# Allegro board moving_head_at88.brd
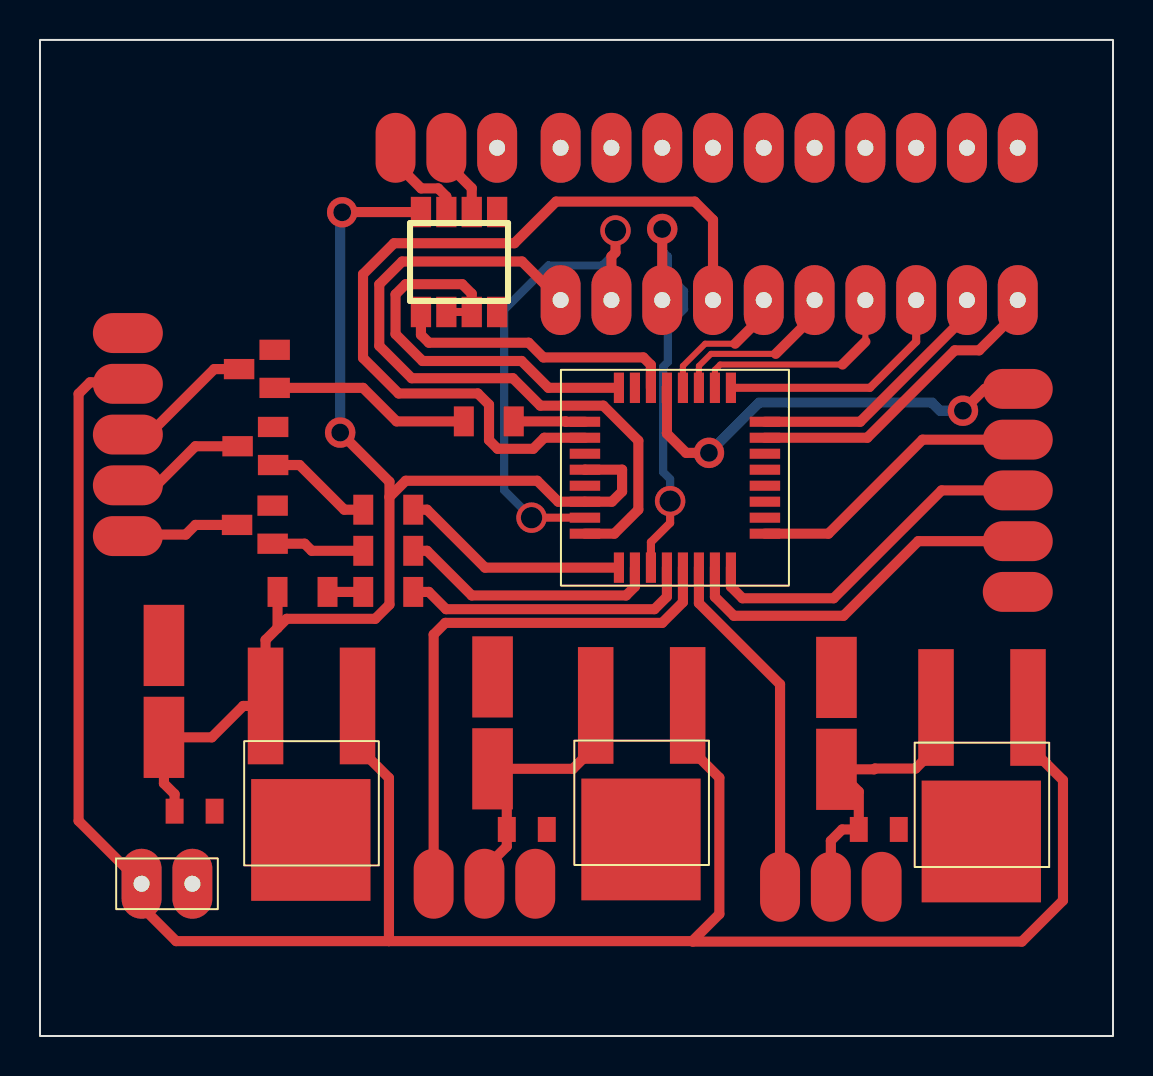
[diagram p0: board, top side]
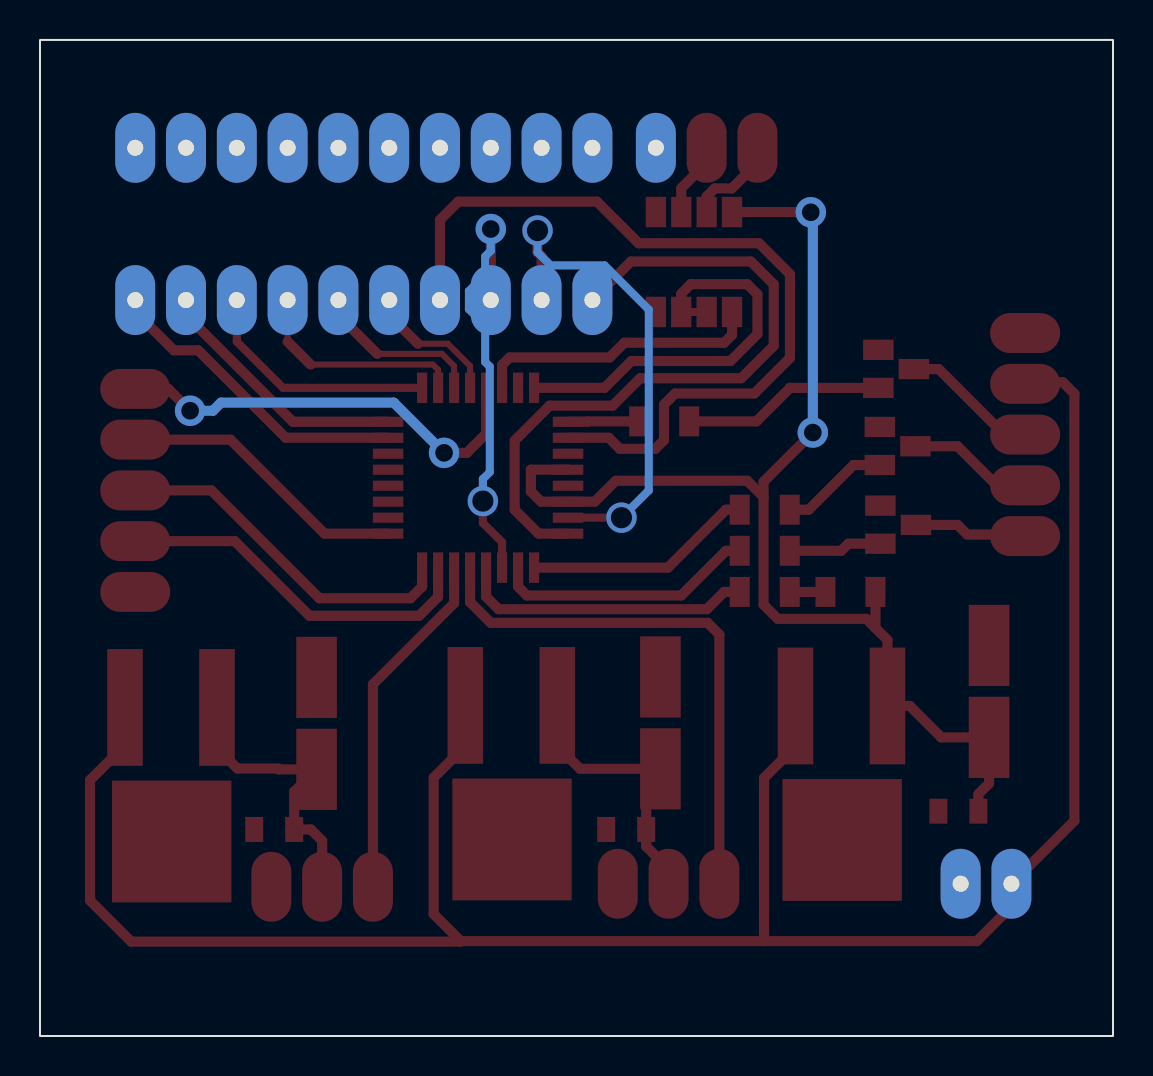
[diagram p1: board, bottom side, seen from below]

Outline 53.66 x 49.85 mm; copper layers: TOP, BOTTOM. Coordinates in mm from the lower left corner of the outline.
Outline path: rectangle 0,0 53.66,49.85

## Design rules (mm)
nets with their own width: min track width 0.127; nets ADR0 ADR1 ADR2 ADR3 ADR4 ADR5 ADR6 ADR7 ADR8 ADR9 INT0 MISO MOSI N07188 N07798 N07802 N08332 N08486 N08516 N12693 N12697 N13371 PWM_BLUE PWM_GREEN PWM_RED PWM_SERVO1 PWM_SERVO2 READ_LED RESET RXD SCK TXD VCC_12 VCC_SERVO1 VCC_SERVO2
nets with their own width: min track width 0.406; nets GND

## Placement (name value [footprint] x y rotation side)
C6  100uF  [FGCAP6377]  6.2 17.25 0 top
C7  100nF  [FG0805C]  6.73 11.25 0 top
C8  100uF  [FGCAP6377]  22.63 15.67 0 top
C9  100nF  [FG0805C]  23.34 10.34 0 top
C10  100uF  [FGCAP6377]  39.83 15.65 0 top
C11  100nF  [FG0805C]  40.94 10.34 0 top
J1  POWER  [JUMPER2]  5.08 7.62 0 top
J2  ADRESS  [FGDIP10]  48.89 36.83 270 bottom
J4  ISP  [FGCONN5]  48.89 32.39 180 top
J6  DMX  [FGCONN3#2]  22.86 44.45 90 top
J8  SERVO1  [FGCONN3]  19.69 7.62 270 top
J9  SERVO2  [FGCONN3]  37.01 7.47 270 top
J10  CON5  [FGCONN5]  4.39 25.02 0 top
LED2  GREEN  [FG0805R]  14.13 22.22 180 top
Q1  MOSFET N  [SOT23]  10.74 25.58 180 top
Q2  MOSFET N  [SOT23]  10.77 29.51 180 top
Q3  MOSFET N  [SOT23]  10.85 33.38 180 top
R3  390  [FG0805R]  18.41 22.22 180 top
R4  RESISTOR  [FG0805R]  18.41 24.28 180 top
R5  RESISTOR  [FG0805R]  18.41 26.34 180 top
R6  RESISTOR  [FG0805R]  23.44 30.76 180 top
U1  78HT2  [TO252AA]  15.88 16.48 180 top
U2  75176  [SO8]  20.95 38.73 90 top
U3  78HT2  [TO252AA]  32.38 16.51 180 top
U4  78HT2  [TO252AA]  49.4 16.41 180 top
U5  Atmega88  [TQFP32]  31.75 27.94 0 top

## Library data of the parts
C6 C8 C10 = CAP
C7 C9 C11 = CAP NP
J1 = CON2: User Part Number: ***
J2 = JUMPER10
J4 J10 = CON5
J6 J8 J9 = CON3
LED2 = LED
Q1-Q3 = MOSFET N_0
R3-R6 = RESISTOR
U1 U3 U4 = 78HT2
U2 = 75176_0
U5 = Atmega88_3

## Footprints (pads in the part's own frame, mm; a bottom-side part is the same pattern mirrored in y, then rotated)
FG0805C
  rect 0.9x1.25 smd: 1(0,0) 2(2,0)
FG0805R
  rect 1x1.5 smd: 1(-0.25,0) 2(2.25,0)
FGCAP6377
  rect 2.032x4.064 smd: 1(0,-2.3) 2(0,2.3)
FGCONN3
  oval 3.5x2 smd: 1(0,0) 2(0,2.54) 3(0,5.08)
FGCONN3#2
  oval 3.5x2 hole 0.8: 1(0,0)
  oval 3.5x2 smd: 2(0,2.54) 3(0,5.08)
FGCONN5
  oval 3.5x2 smd: 1(0,0) 2(0,2.54) 3(0,5.08) 4(0,7.62) 5(0,10.16)
FGDIP10
  oval 3.5x2 hole 0.8: 1(0,0) 2(-7.62,0) 3(0,2.54) 4(-7.62,2.54) 5(0,5.08) 6(-7.62,5.08) 7(0,7.62) 8(-7.62,7.62) 9(0,10.16) 10(-7.62,10.16) 11(0,12.7) 12(-7.62,12.7) 13(0,15.24) 14(-7.62,15.24) 15(0,17.78) 16(-7.62,17.78) 17(0,20.32) 18(-7.62,20.32) 19(0,22.86) 20(-7.62,22.86)
JUMPER2
  oval 2x3.5 hole 0.8: 1(0,0) 2(2.54,0)
SO8
  rect 1.524x1.016 smd: 1(-2.5,1.905) 2(-2.5,0.635) 3(-2.5,-0.635) 4(-2.5,-1.905) 5(2.5,-1.905) 6(2.5,-0.635) 7(2.5,0.635) 8(2.5,1.905)
SOT23
  rect 1.524x1.016 smd: 1(-0.889,0.94) 2(-0.889,-0.965) 3(0.889,0)
TO252AA
  rect 1.778x5.842 smd: 1(-0.004,-0.034) 3(4.596,-0.034)
  rect 5.969x6.096 smd: 2(2.332,6.673)
TQFP32
  rect 1.524x0.508 smd: 1(-4.5,2.8) 2(-4.5,2) 3(-4.5,1.2) 4(-4.5,0.4) 5(-4.5,-0.4) 6(-4.5,-1.2) 7(-4.5,-2) 8(-4.5,-2.8) 17(4.5,-2.8) 18(4.5,-2) 19(4.5,-1.2) 20(4.5,-0.4) 21(4.5,0.4) 22(4.5,1.2) 23(4.5,2) 24(4.5,2.8)
  rect 0.508x1.524 smd: 9(-2.8,-4.5) 10(-2,-4.5) 11(-1.2,-4.5) 12(-0.4,-4.5) 13(0.4,-4.5) 14(1.2,-4.5) 15(2,-4.5) 16(2.8,-4.5) 25(2.8,4.5) 26(2,4.5) 27(1.2,4.5) 28(0.4,4.5) 29(-0.4,4.5) 30(-1.2,4.5) 31(-2,4.5) 32(-2.8,4.5)

## Nets
GND: C6.2 C7.2 C8.2 C9.2 C10.2 C11.2 J1.2 J2.2 J2.4 J2.6 J2.8 J2.10 J2.12 J2.14 J2.16 J2.18 J2.20 J4.5 J6.1 J8.3 J9.3 J10.5 Q1.2(SOURCE) Q2.2(SOURCE) Q3.2(SOURCE) U1.2 U2.5 U3.2 U4.2 U5.3(GND0) U5.5(GND1) U5.21(GND2)
VCC_5V: C6.1 C7.1 LED2.2(ANODE) U1.3(VOUT) U2.8 U5.4(VCC0) U5.6(VCC1) U5.18(AVCC)
VCC_12: J1.1 J10.4 U1.1(VIN) U3.1(VIN) U4.1(VIN)
VCC_SERVO1: C8.1 C9.1 J8.2 U3.3(VOUT)
VCC_SERVO2: C10.1 C11.1 J9.2 U4.3(VOUT)
ADR0: J2.1 U5.23(PC0 (ADC0))
ADR1: J2.3 U5.24(PC1 (ADC1))
ADR2: J2.5 U5.25(PC2 (ADC2))
ADR3: J2.7 U5.26(PC3 (ADC3))
ADR4: J2.9 U5.27(PC4 (ADC4))
ADR5: J2.11 U5.28(PC5 (ADC5))
ADR6: J2.13 U5.2(PD4)
ADR7: J2.15 U5.11(PD7 (AIN1))
ADR8: J2.17 U5.7(PB6 (XTAL1))
ADR9: J2.19 U5.8(PB7 (XTAL2))
INT0: U2.2(RE) U2.3(DE) U5.32(PD2 (INT0))
MISO: J4.3 U5.16(PB4 (MISO))
MOSI: J4.4 U5.15(PB3 (MOSI))
PWM_BLUE: R6.1 U5.1(PD3 (OC2B))
PWM_GREEN: R5.1 U5.9(PD5 (OC0B))
PWM_RED: R4.1 U5.10(PD6 (OC0A))
PWM_SERVO1: J8.1 U5.13(PB1 (OC1A))
PWM_SERVO2: J9.1 U5.14(PB2 (OC1B))
READ_LED: R3.1 U5.12(PB0)
RESET: J4.1 U5.29(PC6 (RESET))
RXD: U2.1(R) U5.30(PD0 (RXD))
SCK: J4.2 U5.17(PB5 (SCK))
TXD: U2.4(D) U5.31(PD1 (TXD))
N07188: LED2.1(CATHODE) R3.2
N07798: J6.3 U2.7(B)
N07802: J6.2 U2.6(A)
N08332: Q3.1(GATE) R6.2
N08486: J10.1 Q1.3(DRAIN)
N08516: J10.3 Q3.3(DRAIN)
N12693: Q1.1(GATE) R4.2
N12697: Q2.1(GATE) R5.2
N13371: J10.2 Q2.3(DRAIN)

Pads without a net: U5 19 20 22

## Via types
v1: diameter 1.524, hole 0.889, TOP to BOTTOM, 5 vias
v2: diameter 1.524, hole 1.067, TOP to BOTTOM, 3 vias

## Routing (per net, layer and track width the routed paths; a pad name or vN(x,y) marks a point on that pad's centre or on a via; arc(x,y) is an arc through that point)
VCC_5V: length 61.9
  TOP w0.508: 11.88,20.42 12.34,20.88 16.76,20.88 17.48,21.59 17.48,26.97 ; 11.88,20.42 11.28,19.82 U1.3 10.16,16.52 8.59,14.95 C6.1 6.2,12.64 6.73,12.11 C7.1 ; 11.88,20.42 LED2.2 ; 17.48,26.97 17.48,27.74 v1(15.01,30.2) ; 17.48,26.97 18.29,27.79 24.87,27.79 25.91,26.74 U5.6 28.6,26.74 29.11,27.25 29.11,28.34 27.25,28.34 U5.4 ; v1(15.11,41.22) 15.74,41.22 15.75,41.24 U2.8
  BOTTOM w0.508: v1(15.11,41.22) 15.11,40.69 15.01,40.59 v1(15.01,30.2)
VCC_12: length 113.3
  TOP w0.508: 32.62,4.75 32.64,4.72 49.1,4.72 51.16,6.78 51.16,12.8 49.4,14.55 49.4,16.59 ; 32.62,4.75 33.97,6.1 33.97,12.93 32.39,14.51 U3.1 ; 32.62,4.75 17.45,4.75 ; 17.45,4.75 6.81,4.75 5.08,6.48 J1.1 1.93,10.77 1.93,32.14 2.5,32.72 4.44,32.72 ; 17.45,4.75 17.45,12.91 15.88,14.49 U1.1
VCC_SERVO1: length 14.2
  TOP w0.508: J8.2 22.22,8.37 23.34,9.49 C9.1 23.34,12.66 C8.1 26.65,13.37 27.79,14.51 U3.3
VCC_SERVO2: length 14.9
  TOP w0.508: U4.3 44.81,14.41 43.78,13.39 41.75,13.39 41.71,13.35 C10.1 40.94,12.23 C11.1 40.11,10.34 39.55,9.77 J9.2
ADR0: length 15.5
  TOP w0.508: 48.82,36.53 48.82,36.17 46.96,34.32 45.75,34.32 41.37,29.94 U5.23
ADR1: length 13.1
  TOP w0.508: U5.24 41.02,30.74 46.35,36.08 J2.3
ADR2: length 12.3
  TOP w0.406: U5.25 41.51,32.44 43.81,34.75 J2.5
ADR3: length 11.1
  TOP w0.305: 41.27,34.75 J2.7 ; 40.13,33.6 34.01,33.6 33.75,33.34 U5.26
  TOP w0.508: 40.13,33.6 41.27,34.75
ADR4: length 8.7
  TOP w0.305: 36.79,34.14 33.56,34.14 32.95,33.53 U5.27 ; 38.73,36.08 J2.9
  TOP w0.508: 36.79,34.14 38.73,36.08
ADR5: length 6.9
  TOP w0.305: 34.76,34.65 33.26,34.65 32.15,33.53 U5.28 ; J2.11 36.19,36.08
  TOP w0.508: 36.19,36.08 34.76,34.65
ADR6: length 41.8
  TOP w0.508: J2.13 33.65,40.84 32.74,41.76 25.81,41.76 23.72,39.67 17.7,39.67 16.15,38.13 16.15,33.93 17.93,32.16 21.89,32.16 22.45,31.6 22.45,29.82 22.89,29.39 24.66,29.39 25.22,29.94 U5.2
ADR7: length 21.9
  TOP w0.406: v2(31.51,26.77) 31.51,25.68 30.55,24.72 U5.11
  TOP w0.508: v1(31.11,40.39) 31.11,36.83
  BOTTOM w0.406: v1(31.11,40.39) 31.11,39.29 31.39,39.01 31.39,38.1 32.21,37.28 32.21,36.38 31.39,35.56 31.39,33.73 31.17,33.5 31.17,28.22 31.51,27.87 v2(31.51,26.77)
ADR8: length 25.1
  TOP w0.406: U5.7 v2(24.58,25.94)
  TOP w0.508: J2.17 28.57,39.01 28.78,39.22 v2(28.78,40.31)
  BOTTOM w0.406: v2(24.58,25.94) 23.22,27.3 23.22,36.35 25.43,38.56 28.12,38.56 28.78,39.22 v2(28.78,40.31)
ADR9: length 35
  TOP w0.508: J2.19 24.1,38.76 18.11,38.76 16.97,37.62 16.97,34.54 18.59,32.92 23.65,32.92 25.02,31.55 28.17,31.55 29.92,29.79 29.92,26.34 28.72,25.14 U5.8
INT0: length 20.7
  TOP w0.406: U2.2 U2.3
  TOP w0.508: U5.32 25.43,32.44 24.08,33.78 19.13,33.78 17.78,35.13 17.78,37.12 18.29,37.62 21.12,37.62 21.59,37.15 U2.3
MISO: length 17.8
  TOP w0.508: U5.16 34.55,22.49 35.13,21.91 39.69,21.91 45.08,27.3 J4.3
MOSI: length 18.5
  TOP w0.508: U5.15 33.75,21.98 34.7,21.03 40.18,21.03 43.92,24.77 J4.4
PWM_BLUE: length 3.6
  TOP w0.508: U5.1 26.3,30.74 26.28,30.76 R6.1
PWM_GREEN: length 11.5
  TOP w0.508: R5.1 19.36,26.34 22.26,23.44 U5.9
PWM_RED: length 13.1
  TOP w0.508: U5.10 29.75,22.49 29.31,22.05 21.59,22.05 19.36,24.28 R4.1
PWM_SERVO1: length 27.3
  TOP w0.508: U5.13 32.15,21.71 31.11,20.68 20.27,20.68 19.69,20.09 J8.1
PWM_SERVO2: length 17.7
  TOP w0.508: J9.1 37.01,17.6 32.95,21.66 U5.14
READ_LED: length 14.8
  TOP w0.508: R3.1 19.44,22.22 20.31,21.36 30.73,21.36 31.35,21.98 U5.12
RESET: length 21.9
  TOP w0.508: J4.1 47.24,32.39 v1(46.15,31.29) ; v1(33.45,29.18) 32.31,29.18 31.35,30.14 U5.29
  BOTTOM w0.508: v1(33.45,29.18) 35.97,31.7 44.6,31.7 45.01,31.29 v1(46.15,31.29)
RXD: length 14.4
  TOP w0.508: U5.30 30.55,33.58 30.17,33.96 25.17,33.96 24.43,34.7 19.45,34.7 19.05,35.09 U2.1
SCK: length 14.6
  TOP w0.508: U5.17 39.43,25.14 44.13,29.84 J4.2
N07188: length 1.8
  TOP w0.508: LED2.1 R3.2
N07798: length 4.8
  TOP w0.508: J6.3 17.78,43.7 19.06,42.42 19.91,42.42 20.32,42.01 U2.7
N07802: length 3.7
  TOP w0.508: J6.2 20.32,43.7 21.59,42.43 U2.6
N08332: length 10.2
  TOP w0.508: R6.2 17.83,30.76 16.15,32.44 Q3.1
N08486: length 5.6
  TOP w0.508: Q1.3 7.77,25.58 7.29,25.1 4.44,25.1
N08516: length 6.8
  TOP w0.508: Q3.3 8.71,33.38 5.51,30.18 4.44,30.18
N12693: length 4.7
  TOP w0.508: R4.2 13.59,24.28 13.23,24.64 Q1.1
N12697: length 5.4
  TOP w0.508: Q2.1 12.98,28.58 15.21,26.34 R5.2
N13371: length 6.2
  TOP w0.508: 4.44,27.64 5.89,27.64 7.77,29.51 Q2.3
